# Altium PCB HD301_driver.PcbDoc (part 1 of 2)
Units mm, origin at the board's own origin, x right, y up, seen from the top; angles counter-clockwise.
Board outline 50 x 25 mm, 4 copper layers (Top, GND, POWER, Bottom), stack 0.899 mm thick; 105 components, 92 nets, 393 pads, 168 vias.
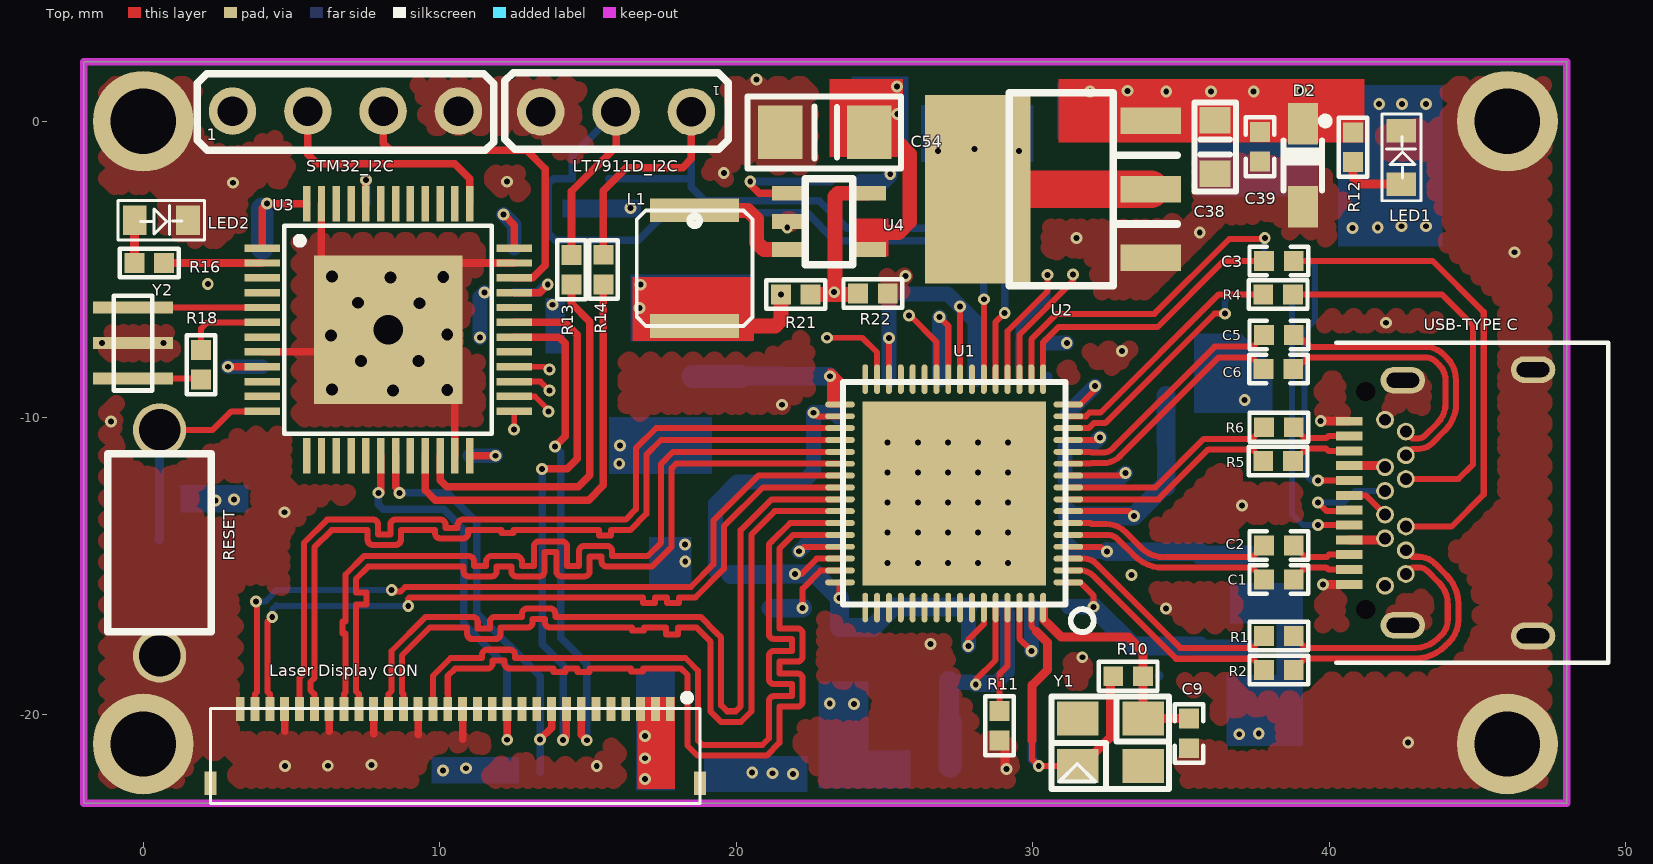
[diagram p0: Top view]
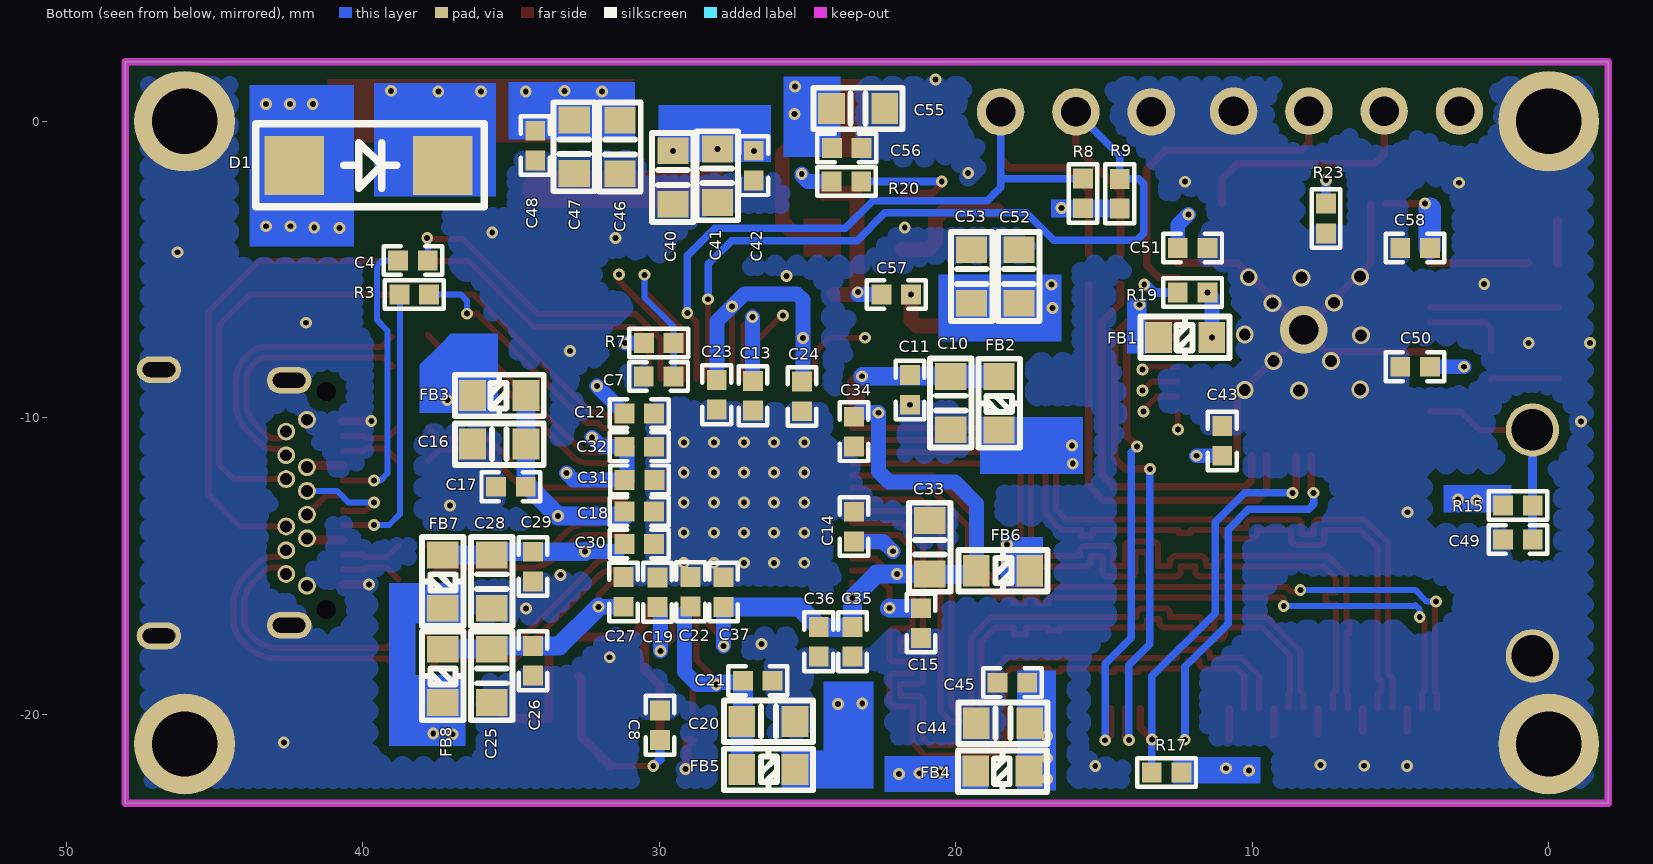
[diagram p1: Bottom view, seen from below]
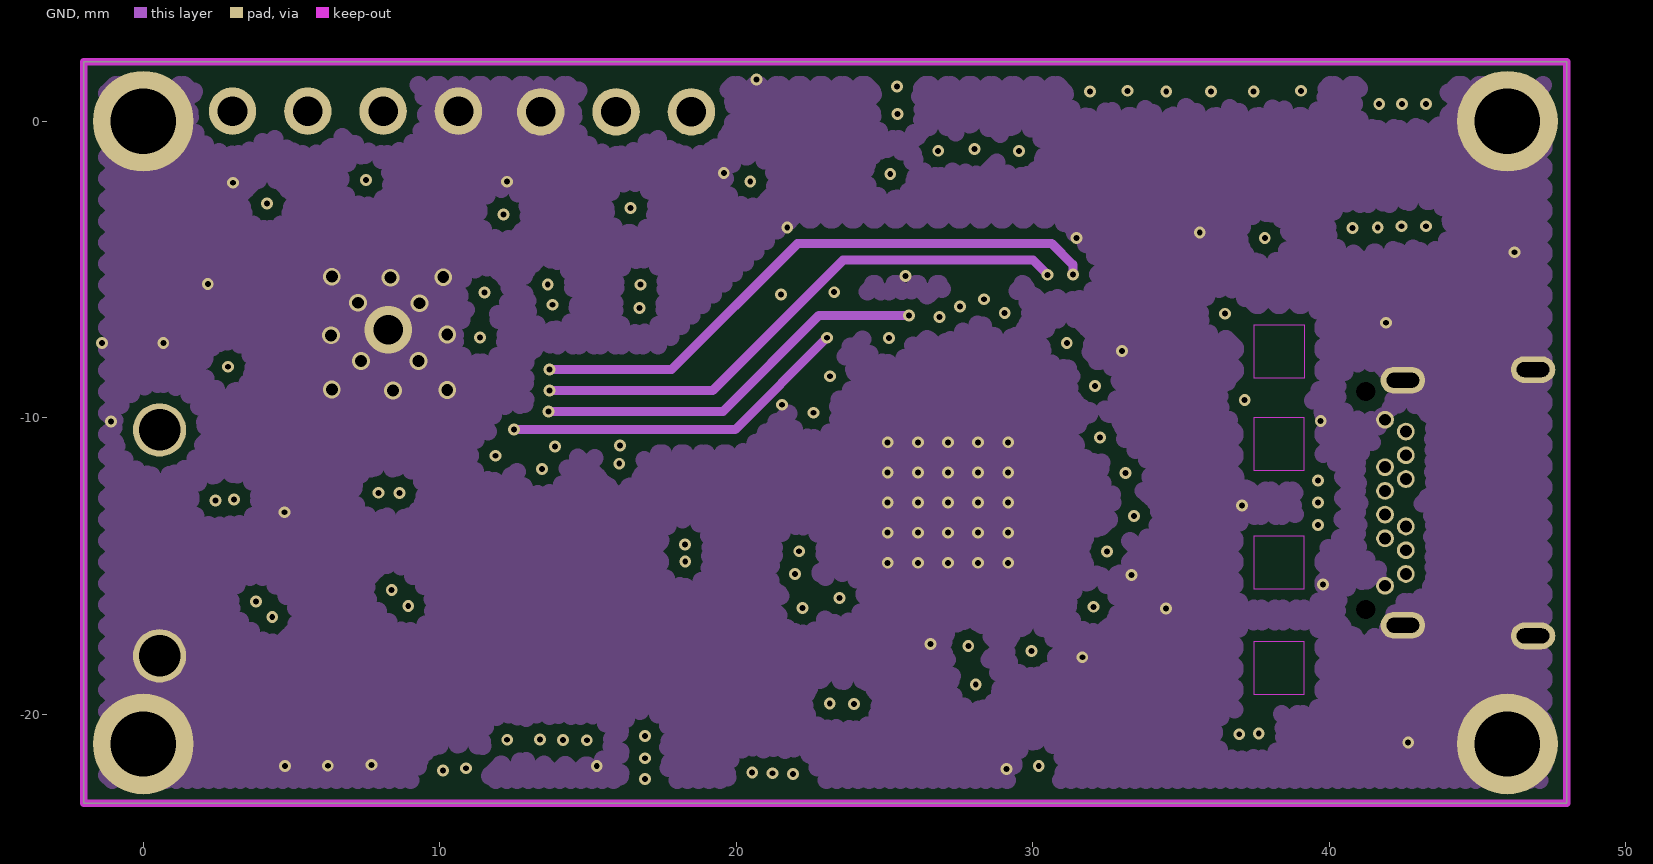
[diagram p2: GND]
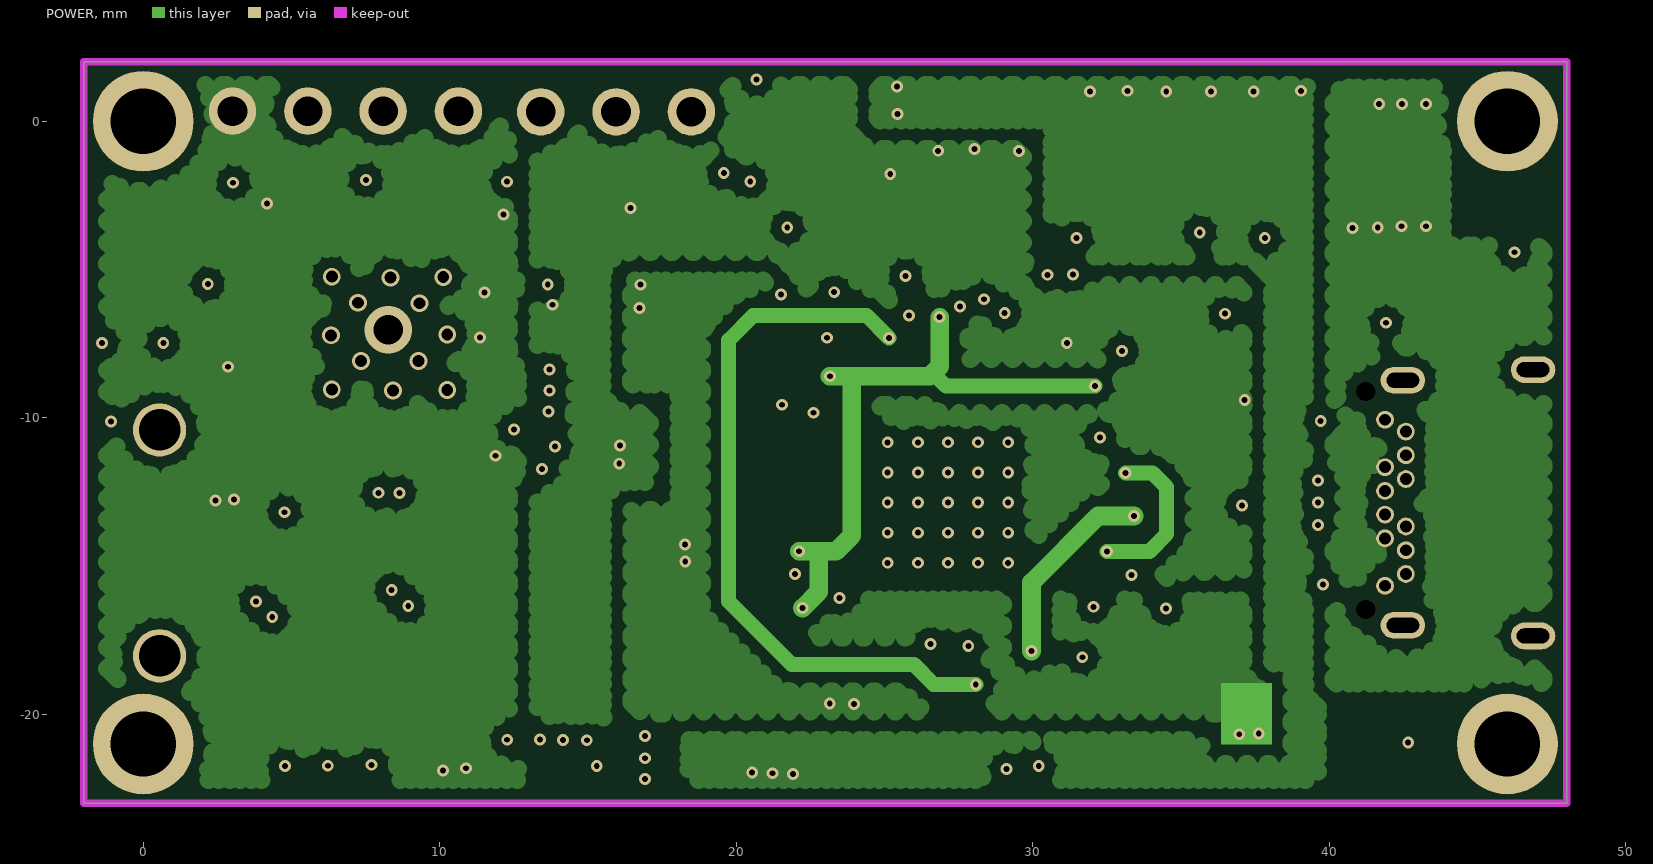
[diagram p3: POWER]

## Layer stack, top to bottom
Solder Mask Top: solder mask 0.0102, Solder Resist, Dk 3.5
Top: signal copper 0.0343
Dielectric 1: dielectric 0.254, FR-4, Dk 4.3
GND: signal copper 0.0343
Dielectric2: dielectric 0.254, FR-4, Dk 4.3
POWER: signal copper 0.0343
Dielectric3: dielectric 0.254, FR-4, Dk 4.3
Bottom: signal copper 0.0343
Solder Mask Bottom: solder mask 0.0102, Solder Resist, Dk 3.5

## Board outline
-2,-23 -2,2 48,2 48,-23

## Design rules (kind name [scope] priority, off if disabled: settings)
Clearance [All] p1: gap=0.152 except(0.35: Arc-Poly Arc-Region Track-Poly Track-Region SMDPad-Poly SMDPad-Region THPad-Poly THPad-Region Via-Poly Via-Region Fill-Poly Fill-Region Poly-Poly Poly-Region Poly-Text Region-Region Region-Text)
ComponentClearance "ComponentClearance - Default - DEFAULT" [All] p1: gap=0.152 collisioncheckmode=3 verticalgap=0.254 showdistances=FALSE
DiffPairsRouting DiffPair_DiffPairsRouting [InDifferentialPairClass('MIPIDiffPairs')] p1: maxlimit=0.2 minlimit=0.152 mostfreqgap=0.152 toplayer_minwidth=0.2 toplayer_maxwidth=0.3 toplayer_prefwidth=0.2 midlayer1_minwidth=0.2 midlayer1_maxwidth=0.3 midlayer1_prefwidth=0.2 midlayer2_minwidth=0.2 midlayer2_maxwidth=0.3 midlayer2_prefwidth=0.2 bottomlayer_minwidth=0.2 bottomlayer_maxwidth=0.3 bottomlayer_prefwidth=0.2 maxuncoupledlength=12.7
DiffPairsRouting "DiffPairsRouting - DiffPair - Default" [All] p2 off: maxlimit=0.152 minlimit=0.152 mostfreqgap=0.152 toplayer_minwidth=0.203 toplayer_maxwidth=0.203 toplayer_prefwidth=0.203 midlayer1_minwidth=0.203 midlayer1_maxwidth=0.203 midlayer1_prefwidth=0.203 midlayer2_minwidth=0.203 midlayer2_maxwidth=0.203 midlayer2_prefwidth=0.203 bottomlayer_minwidth=0.203 bottomlayer_maxwidth=0.203 bottomlayer_prefwidth=0.203 maxuncoupledlength=12.7
FanoutControl Fanout_SOIC [IsSOIC] p1: bgadir=Out bgaviamode=Centered fanoutstyle=Auto fanoutdirection=Alternating viagrid=0.025 // Fanout_SOIC (Default Rule)
FanoutControl Fanout_Small [(CompPinCount < 5)] p2: bgadir=Out bgaviamode=Centered fanoutstyle=Auto fanoutdirection=OutThenIn viagrid=0.025 // Fanout_Small (Default Rule)
FanoutControl Fanout_BGA [IsBGA] p3: bgadir=Out bgaviamode=Centered fanoutstyle=Auto fanoutdirection=Alternating viagrid=0.025 // Fanout_BGA (Default Rule)
FanoutControl Fanout_LCC [IsLCC] p4: bgadir=Out bgaviamode=Centered fanoutstyle=Auto fanoutdirection=Alternating viagrid=0.025 // Fanout_LCC (Default Rule)
HoleToHoleClearance "HoleToHoleClearance - Default - DEFAULT" [All] p1: gap=0.152 allowstackedmicrovias=TRUE
Length All [All] p1: maxlimit=1270 minlimit=0
Length "Default Length" [All] p2: maxlimit=1270 minlimit=0
MatchedLengths DiffPair_MatchedLengths [InDifferentialPairClass('MIPIDiffPairs')] p1: tolerance=0.2 checknetsindiffpair=FALSE checkdiffpairvsdiffpair=TRUE checkxsignals=TRUE checkothers=TRUE
MatchedLengths [All] p2 off: tolerance=0.127 checknetsindiffpair=FALSE checkdiffpairvsdiffpair=TRUE checkxsignals=TRUE checkothers=TRUE
MaxMinImpedance "Default Impedance" [All] p1: minimum=50.00 maximum=150.0
ParallelSegment "Default Parallel Segment Adjasent" [All] p1: limit=25.4 gap=5.08
ParallelSegment "Default Parallel Segment Same Layer" [All] p2: limit=25.4 gap=5.08
PlaneClearance "PlaneClearance - FootPrint 'CD7_3MM'" [HasFootprint('CD7_3MM')] p1: clearance=0.4 // PAD - Power Plane Clearance
PlaneConnect "PlaneConnect - FootPrint 'CD7_3MM'" [HasFootprint('CD7_3MM')] p1: planeconnectstyle=Relief reliefexpansion=0.25 reliefentries=4 reliefconductorwidth=0.4 reliefairgap=0.15
PlaneConnect "PlaneConnect - FootPrint 'CD7_3MM'_3" [HasFootprint('CD7_3MM')] p2: planeconnectstyle=Relief reliefexpansion=0.25 reliefentries=4 reliefconductorwidth=0.4 reliefairgap=0.15
PlaneConnect "Default PlaneConnect" [All] p3: planeconnectstyle=Direct reliefexpansion=0.508 reliefentries=4 reliefconductorwidth=0.381 reliefairgap=0.254
PolygonConnect "PolygonConnect - Default SMT" [IsSMTPin] p1: connectstyle=Direct reliefconductorwidth=0.254 reliefentries=4 polygonreliefangle="45 Angle" airgapwidth=0.254
PolygonConnect "PolygonConnect - FootPrint 'CD7_3MM'" [HasFootprint('CD7_3MM')] p2: connectstyle=Direct reliefconductorwidth=0.4 reliefentries=4 polygonreliefangle="45 Angle" airgapwidth=0.15
PolygonConnect "PolygonConnect - FootPrint 'CD7_3MM'_2" [HasFootprint('CD7_3MM')] p3: connectstyle=Relief reliefconductorwidth=0.4 reliefentries=4 polygonreliefangle="45 Angle" airgapwidth=0.15
PolygonConnect "PolygonConnect - Default Pad" [All] p4: connectstyle=Direct reliefconductorwidth=0.381 reliefentries=4 polygonreliefangle="45 Angle" airgapwidth=0.254
RoutingCorners [All] p1: cornerstyle=Round minsetback=2.54 maxsetback=2.54
RoutingLayers "RoutingLayers - Default - DEFAULT" [All] p1: top layer_v5=TRUE mid layer 1_v5=TRUE mid layer 2_v5=TRUE bottom layer_v5=TRUE
RoutingPriority "RoutingPriority - Default - DEFAULT" [All] p1: routingpriority=3
RoutingTopology "Default Routing Topology" [All] p1: topology=Shortest
RoutingVias "RoutingVias - Default - DEFAULT" [All] p1: holewidth=0.94 width=1.397 viastyle="Through Hole" minholewidth=0.94 minwidth=1.397 maxholewidth=0.94 maxwidth=1.397
SMDToCorner "SMDToCorner - Default - DEFAULT" [All] p1 off: distance=60000
SilkToBoardRegionClearance [All] p1 off:
SilkToSilkClearance [All] p1 off: silktosilkclearance=0.254
SilkToSolderMaskClearance [IsPad] p1 off: minsilkscreentomaskgap=0.254 clearancetoexposedcopper=TRUE
SolderMaskExpansion "SolderMaskExpansion from CAM settings" [All] p1 off: expansion=0.051
UnpouredPolygon [All] p1 off:
Width "Default Width" [All] p1: maxlimit=2 minlimit=0.152 preferedwidth=0.203 minimp=50.000000 maximp=50.000000 favimp=50.000000
13 further rules are at their usual default settings.

## Classes and differential pairs
net class C1_Nets: DP_D1_P NetC1_1
net class C2_Nets: DP_D1_N NetC2_1
net class C3_Nets: AUX+ NetC3_1
net class C4_Nets: AUX- NetC4_1
net class C5_Nets: DP_D3_N NetC5_1
net class C6_Nets: DP_D3_P NetC6_1
net class C7_Nets: GND RSTN
net class C8_Nets: GND XTALO
net class C9_Nets: GND XTALI
net class C10_Nets: GND VCC33_TX
net class C11_Nets: GND VCC33_TX
net class C12_Nets: GND VCC33_TX
net class C13_Nets: GND VCC33_TX
net class C14_Nets: GND VCC33_TX
net class C15_Nets: GND VCC33_TX
net class C16_Nets: GND VCC33_RX
net class C17_Nets: GND VCC33_RX
net class C18_Nets: GND VCC33_RX
net class C19_Nets: GND VCC33_RX
net class C20_Nets: GND VDD
net class C21_Nets: GND VDD
net class C22_Nets: GND VDD
net class C23_Nets: GND VDD
net class C24_Nets: GND VDD
net class C25_Nets: GND VCC12D_RX
net class C26_Nets: GND VCC12D_RX
net class C27_Nets: GND VCC12D_RX
net class C28_Nets: GND VCC12A_RX
net class C29_Nets: GND VCC12A_RX
net class C30_Nets: GND VCC12A_RX
net class C31_Nets: GND VCC12A_RX
net class C32_Nets: GND VCC12A_RX
net class C33_Nets: GND VCC12_TX
net class C34_Nets: GND VCC12_TX
net class C35_Nets: GND VCC12_TX
net class C36_Nets: GND VCC12_TX
net class C37_Nets: GND VCC12_TX
net class C38_Nets: +5V GND
net class C39_Nets: +5V GND
net class C40_Nets: GND VCC33
net class C41_Nets: GND VCC33
net class C42_Nets: GND VCC33
net class C43_Nets: GND VCC33_STM
net class C44_Nets: GND NetC44_1
net class C45_Nets: GND NetC44_1
net class C46_Nets: +5V GND
net class C47_Nets: +5V GND
net class C48_Nets: +5V GND
net class C49_Nets: GND NRST
net class C50_Nets: GND VCC33_STM
net class C51_Nets: GND VCC33_STM
net class C52_Nets: GND NetC52_1
net class C53_Nets: GND NetC52_1
net class C54_Nets: +5V GND
net class C55_Nets: +5V GND
net class C56_Nets: +5V GND
net class C57_Nets: NetC52_1 NetC57_1
net class C58_Nets: GND VCC33_STM
net class D1_Nets: +5V VBUS
net class D2_Nets: +5V GND
net class FB1_Nets: VCC33 VCC33_STM
net class FB2_Nets: VCC33 VCC33_TX
net class FB3_Nets: VCC33 VCC33_RX
net class FB4_Nets: +5V NetC44_1
net class FB5_Nets: NetC52_1 VDD
net class FB6_Nets: NetC52_1 VCC12_TX
net class FB7_Nets: NetC52_1 VCC12A_RX
net class FB8_Nets: NetC52_1 VCC12D_RX
net class L1_Nets: NetC52_1 NetL1_1
net class "Laser Display CON_Nets": GND HD_READY HD_RESET MIPI_N1_CLK_N MIPI_N1_CLK_P MIPI_N1_D0_N MIPI_N1_D0_P MIPI_N1_D1_N MIPI_N1_D1_P MIPI_N1_D2_N MIPI_N1_D2_P MIPI_N1_D3_N MIPI_N1_D3_P NetC44_1 "NetLaser Display CON_4" "NetLaser Display CON_5" "NetLaser Display CON_6" "NetLaser Display CON_10" "NetLaser Display CON_11" "NetLaser Display CON_13" "NetLaser Display CON_14" UART_RX UART_TX
net class LED1_Nets: GND NetLED1_1
net class LED2_Nets: GND NetLED2_1
net class LT7911D_I2C_Nets: CSCL CSDA GND
net class R1_Nets: DP_D0_N NetR1_2
net class R2_Nets: DP_D0_P NetR2_2
net class R3_Nets: CC1 NetR3_1
net class R4_Nets: CC2 NetR4_2
net class R5_Nets: DP_D2_P NetR5_1
net class R6_Nets: DP_D2_N NetR6_1
net class R7_Nets: RSTN VCC33
net class R8_Nets: CSDA VCC33
net class R9_Nets: CSCL VCC33
net class R10_Nets: XTALI XTALO
net class R11_Nets: GND REXT
net class R12_Nets: +5V NetLED1_1
net class R13_Nets: CSDA NetR13_1
net class R14_Nets: CSCL NetR14_1
net class R15_Nets: NRST VCC33_STM
net class R16_Nets: LED NetLED2_1
net class R17_Nets: HD_RESET VCC33_STM
net class R18_Nets: NetR18_1 NetR18_2
net class R19_Nets: NetR19_1 VCC33_STM
net class R20_Nets: NetR20_2 VCC33
net class R21_Nets: NetC52_1 NetC57_1
net class R22_Nets: GND NetC57_1
net class R23_Nets: GND NetR23_2
net class RESET_Nets: GND NRST
net class STM32_I2C_Nets: GND SWCLK SWDIO VCC33_STM
net class U1_Nets: AUX+ AUX- CC1 CC2 CSCL CSDA DP_D0_N DP_D0_P DP_D1_N DP_D1_P DP_D2_N DP_D2_P DP_D3_N DP_D3_P GND GPIO5 IIS_D0 IIS_MCLK IIS_SCLK IIS_WS MIPI_N0_CLK_N MIPI_N0_CLK_P MIPI_N0_D0_N MIPI_N0_D0_P MIPI_N0_D1_N MIPI_N0_D1_P MIPI_N0_D2_N MIPI_N0_D2_P MIPI_N0_D3_N MIPI_N0_D3_P MIPI_N1_CLK_N MIPI_N1_CLK_P MIPI_N1_D0_N MIPI_N1_D0_P MIPI_N1_D1_N MIPI_N1_D1_P MIPI_N1_D2_N MIPI_N1_D2_P MIPI_N1_D3_N MIPI_N1_D3_P NetU1_23 REXT RSTN SLEEP_33 VCC12_TX VCC12A_RX VCC12D_RX VCC33_RX VCC33_TX VDD VSYNC XTALI XTALO
net class U2_Nets: +5V GND VCC33
net class U3_Nets: GND GPIO5 HD_READY HD_RESET LED NetR13_1 NetR14_1 NetR18_1 NetR19_1 NetR23_2 NetU3_3 NetU3_4 NetU3_5 NetU3_7 NetU3_10 NetU3_11 NetU3_13 NetU3_14 NetU3_15 NetU3_16 NetU3_17 NetU3_20 NetU3_29 NetU3_32 NetU3_38 NetU3_39 NetU3_40 NetU3_41 NetU3_42 NetU3_43 NetU3_45 NetU3_46 NRST RSTN SLEEP_33 SWCLK SWDIO UART_RX UART_TX VCC33_STM VSYNC
net class U4_Nets: +5V GND NetC57_1 NetL1_1 NetR20_2
net class "USB-TYPE C_Nets": GND NetC1_1 NetC2_1 NetC3_1 NetC4_1 NetC5_1 NetC6_1 NetR1_2 NetR2_2 NetR3_1 NetR4_2 NetR5_1 NetR6_1 "NetUSB-TYPE C_5" "NetUSB-TYPE C_6" USB_D_N USB_D_P VBUS
net class Y1_Nets: XTALI XTALO
net class Y2_Nets: GND NetR18_2 NetU3_5
differential pair class MIPIDiffPairs: MIPI_N1_CLK MIPI_N1_D0 MIPI_N1_D1 MIPI_N1_D2 MIPI_N1_D3
differential pair MIPI_N1_CLK: +MIPI_N1_CLK_P -MIPI_N1_CLK_N
differential pair MIPI_N1_D0: +MIPI_N1_D0_P -MIPI_N1_D0_N
differential pair MIPI_N1_D1: +MIPI_N1_D1_P -MIPI_N1_D1_N
differential pair MIPI_N1_D2: +MIPI_N1_D2_P -MIPI_N1_D2_N
differential pair MIPI_N1_D3: +MIPI_N1_D3_P -MIPI_N1_D3_N
differential pair DP_D1: +DP_D1_P -DP_D1_N
differential pair DP_D2: +DP_D2_P -DP_D2_N

## Components (designator, comment, footprint, x,y, rotation, side; value= is the part's Value field where it differs from the comment)
C1 "0.1uF" 0402-C 38.295,-15.449 r180 top
C2 "0.1uF" 0402-C 38.295,-14.306 r180 top
C3 "0.1uF" 0402-C 38.295,-4.71 r180 top
C4 "0.1uF" 0402-C 38.3,-4.7 r180 bottom
C5 "0.1uF" 0402-C 38.295,-7.213 r180 top
C6 "0.1uF" 0402-C 38.279,-8.356 r180 top
C7 "0.1uF" 0402-C 30.017,-8.603 r0 bottom
C8 "15pF" 0402-C 29.974,-20.369 r90 bottom
C9 "15pF" 0402-C 35.265,-20.645 r270 top
C10 "10uF" 0603-C 20.166,-9.506 r270 bottom
C11 "0.1uF" 0402-C 21.54,-9.06 r270 bottom
C12 "0.1uF" 0402-C 30.666,-9.857 r180 bottom
C13 "0.1uF" 0402-C 26.835,-9.255 r270 bottom
C14 "0.1uF" 0402-C 23.427,-13.668 r90 bottom
C15 "0.1uF" 0402-C 21.167,-16.922 r270 bottom
C16 "10uF" 0603-C 35.39,-10.887 r0 bottom
C17 "0.1uF" 0402-C 34.998,-12.325 r0 bottom
C18 "0.1uF" 0402-C 30.666,-13.159 r180 bottom
C19 "0.1uF" 0402-C 30.058,-15.881 r90 bottom
C20 "10uF" 0603-C 26.315,-20.239 r180 bottom
C21 "0.1uF" 0402-C 26.67,-18.867 r180 bottom
C22 "0.1uF" 0402-C 28.936,-15.869 r90 bottom
C23 "0.1uF" 0402-C 28.057,-9.223 r270 bottom
C24 "0.1uF" 0402-C 25.176,-9.28 r270 bottom
C25 "10uF" 0603-C 35.645,-18.7 r270 bottom
C26 "0.1uF" 0402-C 34.248,-18.192 r270 bottom
C27 "0.1uF" 0402-C 31.202,-15.872 r90 bottom
C28 "10uF" 0603-C 35.645,-15.525 r270 bottom
C29 "0.1uF" 0402-C 34.248,-15.017 r270 bottom
C30 "0.1uF" 0402-C 30.666,-14.252 r180 bottom
C31 "0.1uF" 0402-C 30.661,-12.092 r180 bottom
C32 "0.1uF" 0402-C 30.666,-10.975 r180 bottom
C33 "10uF" 0603-C 20.874,-14.365 r90 bottom
C34 "0.1uF" 0402-C 23.427,-10.467 r270 bottom
C35 "0.1uF" 0402-C 23.478,-17.554 r270 bottom
C36 "0.1uF" 0402-C 24.616,-17.554 r270 bottom
C37 "0.1uF" 0402-C 27.83,-15.877 r90 bottom
C38 "10uF" 0603-C 36.143,-0.869 r270 top
C39 "0.1uF" 0402-C 37.655,-0.863 r90 top
C40 "10uF" 0603-C 29.536,-1.898 r270 bottom
C41 "1uF" 0603-C 28.036,-1.838 r270 bottom
C42 "0.1uF" 0402-C 26.807,-1.497 r270 bottom
C43 "0.1uF" 0402-C 11.01,-10.78 r90 bottom
C44 "10uF" 0603-C 18.407,-20.3 r0 bottom
C45 "0.1uF" 0402-C 18.086,-18.933 r0 bottom
C46 "10uF" 0603-C 31.32,-0.87 r270 bottom
C47 "1uF" 0603-C 32.86,-0.86 r270 bottom
C48 "0.1uF" 0402-C 34.178,-0.821 r270 bottom
C49 "0.1uF" 0402-C 1.04,-14.106 r0 bottom
C50 "0.1uF" 0402-C 4.51,-8.28 r180 bottom
C51 "0.1uF" 0402-C 12.01,-4.28 r180 bottom
C52 "10uF" 0603-C 17.868,-5.234 r90 bottom
C53 "10uF" 0603-C 19.461,-5.234 r90 bottom
C54 "47uF" 1206-C 22.975,-0.372 r180 top
C55 "10uF" 0603-C 23.29,0.43 r180 bottom
C56 "0.1uF" 0402-C 23.672,-0.9 r180 bottom
C57 "22pF" 0402-C 22.004,-5.84 r180 bottom
C58 "0.1uF" 0402-C 4.51,-4.28 r0 bottom
D1 "SM340A" SM340A_DO-214AC 39.8,-1.49 r270 bottom
D2 "MM3Z5V6" PDZ_B-SOD323 39.106,-1.49 r270 top
FB1 "220R/100MHz" 0603-FB 12.26,-7.29 r180 bottom
FB2 "220R/100MHz" 0603-FB 18.537,-9.51 r90 bottom
FB3 "220R/100MHz" 0603-FB 35.39,-9.248 r180 bottom
FB4 "220R/100MHz" 0603-FB 18.424,-21.915 r180 bottom
FB5 "220R/100MHz" 0603-FB 26.316,-21.859 r0 bottom
FB6 "220R/100MHz" 0603-FB 18.404,-15.159 r0 bottom
FB7 "220R/100MHz" 0603-FB 37.296,-15.525 r90 bottom
FB8 "220R/100MHz" 0603-FB 37.296,-18.7 r90 bottom
L1 "10uH/1A" Inductor_LPS4018-103MR 18.595,-4.956 r270 top
"Laser Display CON" "MIPI-DSI" 50696-030-0-M 10.52,-19.8 r0 top
LED1 "BLUE" SMD_LED(0603) 42.425,-1.222 r90 top
LED2 "BLUE" SMD_LED(0603) 0.61,-3.34 r0 top
LT7911D_I2C "CON_LT" HEADER-FEMALE-2.54*3 15.944,0.317 r270 top (schematic designator J2)
R1 "0R" 0402-R 38.295,-17.362 r0 top
R2 "0R" 0402-R 38.295,-18.505 r0 top
R3 "0R" 0402-R 38.26,-5.84 r180 bottom
R4 "0R" 0402-R 38.27,-5.84 r0 top
R5 "0R" 0402-R 38.27,-11.46 r180 top
R6 "0R" 0402-R 38.295,-10.318 r180 top
R7 "4.7k" 0402-R 30.01,-7.48 r180 bottom
R8 "4.7k" 0402-R 14.466,-2.446 r270 bottom
R9 "4.7k" 0402-R 15.701,-2.436 r270 bottom
R10 "1M" 0402-R 33.212,-18.716 r0 top
R11 "7K68_1%" 0402-R 28.878,-20.382 r90 top
R12 "510" 0402-R 40.798,-0.874 r270 top
R13 "0R" 0402-R 14.441,-5.005 r90 top
R14 "0R" 0402-R 15.516,-5 r90 top
R15 "4.7k" 0402-R 1.04,-12.961 r180 bottom
R16 "510" 0402-R 0.2,-4.78 r180 top
R17 "4.7k" 0402-R 12.886,-21.96 r180 bottom
R18 "510" 0402-R 1.95,-8.21 r270 top
R19 "4.7k" 0402-R 12.01,-5.78 r180 bottom
R20 "0R" 0402-R 23.682,-2.032 r180 bottom
R21 "150k" 0402-R 22.004,-5.84 r180 top
R22 "150k" 0402-R 24.604,-5.806 r180 top
R23 "4.7k" 0402-R 7.51,-3.28 r90 bottom
RESET "BUTTON_DIP" "Push button_mini(2 pin)" 0.55,-14.22 r0 top
STM32_I2C "CON_STM" HEADER-FEMALE-2.54*4 6.82,0.34 r90 top (schematic designator J3)
U1 "LT7911D" QFN64_EPAD 27.346,-12.549 r180 top
U2 "AMS1117-3.3V" AMS1117_SOT-223_4 33.99,-4.621 r90 top
U3 "STM32F103CBT7" LQFP48-7mm*7mm 8.26,-7.03 r0 top
U4 "TD6810" TD6810_SOT23-5 21.82,-2.43 r270 top
"USB-TYPE C" "USB-TYPEC" USB_TYPEC_RECEPTACLE_DIP 41.226,-16.465 r90 top (schematic designator J1)
Y1 "27MHz" CRY_3225 32.614,-20.944 r180 top
Y2 "8MHz" Resonator_mini -0.34,-7.48 r270 top

## Footprints (in the part's own frame and the unit in brackets; to place one, negate y for a bottom-side part, rotate by r counter-clockwise, add the part's x,y. Pads: shape width x height; smd on the part's side, far side on the other; paste and mask are expansions set on the pad)
0402-C [mm]
  rect 0.67x0.67 smd: 1(-0.5,0) 2(0.5,0)
  silkscreen extent -0.99,-0.48 0.99,0.48
0402-R [mm]
  rect 0.67x0.67 smd: 1(-0.5,0) 2(0.5,0)
  silkscreen extent -0.99,-0.48 0.99,0.48
0603-C [mm]
  rect 0.9x1.05 smd mask+0.05: 1(-0.9,0) 2(0.9,0)
  silkscreen extent -1.5,-0.7 1.5,0.7
0603-FB [mm]
  rect 0.9x1.05 smd mask+0.05: 1(-0.9,0) 2(0.9,0)
  silkscreen extent -1.5,-0.7 1.5,0.7
1206-C [mm]
  rect 1.5x1.8 smd: 1(-1.5,0) 2(1.5,0)
  silkscreen extent -2.58,-1.2 2.6,1.23
50696-030-0-M [mm]
  rect 0.4x0.8 smd: 0(-8.25,-2.52) 0(8.25,-2.52)
  rect 0.3x0.8 smd: 1(7.25,-0.02) 2(6.75,-0.02) 3(6.25,-0.02) 4(5.75,-0.02) 5(5.25,-0.02) 6(4.75,-0.02) 7(4.25,-0.02) 8(3.75,-0.02) 9(3.25,-0.02) 10(2.75,-0.02) 11(2.25,-0.02) 12(1.75,-0.02) 13(1.25,-0.02) 14(0.75,-0.02) 15(0.25,-0.02) 16(-0.25,-0.02) 17(-0.75,-0.02) 18(-1.25,-0.02) 19(-1.75,-0.02) 20(-2.25,-0.02) 21(-2.75,-0.02) 22(-3.25,-0.02) 23(-3.75,-0.02) 24(-4.25,-0.02) 25(-4.75,-0.02) 26(-5.25,-0.02) 27(-5.75,-0.02) 28(-6.25,-0.02) 29(-6.75,-0.02) 30(-7.25,-0.02)
  silkscreen extent -8.25,-3.2 8.25,0.47
AMS1117_SOT-223_4 [mil]
  rect 35x80 smd: 1(0.46,0.53) 2(91.46,0.53) 3(182.46,0.53)
  rect 250x140 smd: 4(91.46,230.53)
  silkscreen extent -37,-34 219,189
CRY_3225 [mm]
  rect 1.4x1.15 smd: 1(1.1,0.8) 2(-1.1,0.8) 3(-1.1,-0.8) 4(1.1,-0.8)
  silkscreen extent -1.98,-1.55 1.98,1.57
HEADER-FEMALE-2.54*3 [mm]
  round 1.6 hole 1: 1(0,2.54) 2(0,0) 3(0,-2.54)
  silkscreen extent -1.32,-3.75 1.26,3.79, body extent -1.46,-3.75 1.26,3.79, height 9
HEADER-FEMALE-2.54*4 [mm]
  round 1.6 hole 1: 1(0,3.81) 2(0,1.27) 3(0,-1.27) 4(0,-3.81)
  silkscreen extent -1.32,-5 1.26,5, body extent -1.32,-5 1.26,5, height 9
Inductor_LPS4018-103MR [mm]
  rect 0.8x3 smd: 1(-1.95,0) 2(1.95,0)
  silkscreen extent -1.95,-1.95 1.95,1.95, body extent -1.95,-1.95 1.95,1.95, height 2.5
LQFP48-7mm*7mm [mm]
  rect 1.2x0.25 smd: 1(-4.25,2.75) 2(-4.25,2.25) 3(-4.25,1.75) 4(-4.25,1.25) 5(-4.25,0.75) 6(-4.25,0.25) 7(-4.25,-0.25) 8(-4.25,-0.75) 9(-4.25,-1.25) 10(-4.25,-1.75) 11(-4.25,-2.25) 12(-4.25,-2.75) 25(4.25,-2.75) 26(4.25,-2.25) 27(4.25,-1.75) 28(4.25,-1.25) 29(4.25,-0.75) 30(4.25,-0.25) 31(4.25,0.25) 32(4.25,0.75) 33(4.25,1.25) 34(4.25,1.75) 35(4.25,2.25) 36(4.25,2.75)
  rect 0.25x1.2 smd: 13(-2.75,-4.25) 14(-2.25,-4.25) 15(-1.75,-4.25) 16(-1.25,-4.25) 17(-0.75,-4.25) 18(-0.25,-4.25) 19(0.25,-4.25) 20(0.75,-4.25) 21(1.25,-4.25) 22(1.75,-4.25) 23(2.25,-4.25) 24(2.75,-4.25) 37(2.75,4.25) 38(2.25,4.25) 39(1.75,4.25) 40(1.25,4.25) 41(0.75,4.25) 42(0.25,4.25) 43(-0.25,4.25) 44(-0.75,4.25) 45(-1.25,4.25) 46(-1.75,4.25) 47(-2.25,4.25) 48(-2.75,4.25)
  rect 5x5 smd: 23(0,0)
  silkscreen extent -3.5,-3.5 3.5,3.5, body extent -4.5,-4.52 4.5,4.48, height 1.5
PDZ_B-SOD323 [mm]
  rect 1.4x1 smd: A(1.4,0) C(-1.4,0)
  silkscreen extent -1.62,-0.65 0.85,0.88
"Push button_mini(2 pin)" [mm]
  round 1.8 hole 1.4: 1(0,3.81) 2(0,-3.81)
  silkscreen extent -1.75,-3 1.75,3, body extent -1.68,-3 1.72,3, height 3
QFN64_EPAD [mm]
  oval 1x0.2 smd: 1(-3.85,3) 2(-3.85,2.6) 3(-3.85,2.2) 4(-3.85,1.8) 5(-3.85,1.4) 6(-3.85,1) 7(-3.85,0.6) 8(-3.85,0.2) 9(-3.85,-0.2) 10(-3.85,-0.6) 11(-3.85,-1) 12(-3.85,-1.4) 13(-3.85,-1.8) 14(-3.85,-2.2) 15(-3.85,-2.6) 16(-3.85,-3) 33(3.85,-3) 34(3.85,-2.6) 35(3.85,-2.2) 36(3.85,-1.8) 37(3.85,-1.4) 38(3.85,-1) 39(3.85,-0.6) 40(3.85,-0.2) 41(3.85,0.2) 42(3.85,0.6) 43(3.85,1) 44(3.85,1.4) 45(3.85,1.8) 46(3.85,2.2) 47(3.85,2.6) 48(3.85,3)
  oval 0.2x1 smd: 17(-3,-3.85) 18(-2.6,-3.85) 19(-2.2,-3.85) 20(-1.8,-3.85) 21(-1.4,-3.85) 22(-1,-3.85) 23(-0.6,-3.85) 24(-0.2,-3.85) 25(0.2,-3.85) 26(0.6,-3.85) 27(1,-3.85) 28(1.4,-3.85) 29(1.8,-3.85) 30(2.2,-3.85) 31(2.6,-3.85) 32(3,-3.85) 49(3,3.85) 50(2.6,3.85) 51(2.2,3.85) 52(1.8,3.85) 53(1.4,3.85) 54(1,3.85) 55(0.6,3.85) 56(0.2,3.85) 57(-0.2,3.85) 58(-0.6,3.85) 59(-1,3.85) 60(-1.4,3.85) 61(-1.8,3.85) 62(-2.2,3.85) 63(-2.6,3.85) 64(-3,3.85)
  rect 6.2x6.2 smd: 65(0,0)
  silkscreen extent -4.71,-3.75 3.75,4.68
Resonator_mini [mm]
  rect 0.4x2.7 smd: 1(-1.2,0) 2(1.2,0) 3(0,0)
  silkscreen extent -1.6,-0.65 1.6,0.65, body extent -1.58,-0.66 1.6,0.64, height 2.5
SM340A_DO-214AC [mm]
  rrect0% 2x2 smd: A(0,-2.5) C(0,2.5)
  silkscreen extent -1.4,-3.8 1.4,3.9
SMD_LED(0603) [mm]
  rect 0.8x1 smd: 1(-0.9,0) 2(0.9,0)
  silkscreen extent -1.46,-0.66 1.46,0.66
TD6810_SOT23-5 [mm]
  rect 0.5x1.22 smd: 1(0,0) 2(0.95,0) 3(1.9,0) 4(1.9,2.62) 5(0,2.62)
  silkscreen extent -0.49,0.51 2.41,2.11
USB_TYPEC_RECEPTACLE_DIP [mm]
  oval 0.9x1.5 hole 0.5 slot 1.1 at 90 deg: 1(-0.53,-1.25) 2(7.73,-1.25) 3(-0.89,-5.64) 4(8.09,-5.64)
  round 0 hole 0.65: 5(0,0) 6(7.35,0)
  rect 0.3x0.9 smd: A1(0.85,0.56) A2(1.35,0.56) A3(1.85,0.56) A4(2.35,0.56) A5(2.85,0.56) A6(3.35,0.56) A7(3.85,0.56) A8(4.35,0.56) A9(4.85,0.56) A10(5.35,0.56) A11(5.85,0.56) A12(6.35,0.56)
  round 0.6 hole 0.4: B1(6.4,-0.65) B2(6,-1.35) B3(5.2,-1.35) B4(4.8,-0.65) B5(4.4,-1.35) B6(4,-0.65) B7(3.2,-0.65) B8(2.8,-1.35) B9(2.4,-0.65) B10(2,-1.35) B11(1.2,-1.35) B12(0.8,-0.65)
  silkscreen extent -1.8,-8.17 9,1

## Part data
C1 C2 C3 C4 C5 C6 C7 C8 C9 C10 C11 C12 C13 C14 C15 C16 C17 C18 C19 C20 C21 C22 C23 C24 C25 C26 C27 C28 C29 C30 C31 C32 C33 C34 C35 C36 C37 C38 C39 C40 C41 C42 C43 C44 C45 C46 C47 C48 C49 C50 C51 C52 C53 C54 C55 C56 C57 C58: library part Cap, "Capacitor"
D1: library part "Diode 10TQ035", "Schottky Rectifier"
D2: library part BAT46W
FB1 FB2 FB3 FB4 FB5 FB6 FB7 FB8 R1 R2 R3 R4 R5 R6 R7 R8 R9 R10 R11 R12 R13 R14 R15 R16 R17 R18 R19 R20 R21 R22 R23: library part Res2, "Resistor"
L1: library part Inductor, "Inductor"
LED1 LED2: library part LED1, "Typical RED GaAs LED"
LT7911D_I2C: library part 3PinConnector
RESET: library part SW-PB, "Switch"
STM32_I2C: library part 4PinConnector
U1: "USB/MIPI port converter"
U2: "3.3V Voltage Regulator"
U3: library part STM32F303CBT7, "32bit MCU"
U4: "voltage regulater"
"USB-TYPE C": "USB-TYPEC INPUT"
Y1: library part XTAL_2, "Crystal Oscillator"
Y2: library part XTAL, "Crystal Oscillator"

## Free pads (board coordinates)
  round 3.4 hole 2.2: 2(0,-21) 2(0,0) 2(46,-21) 2(46,0)

## Via types
v1: diameter 0.4, hole 0.2, Top to Bottom, 155 vias
v2: diameter 0.6, hole 0.4, Top to Bottom, 12 vias
v3: diameter 1.6, hole 1, Top to Bottom, 1 vias

## Nets (pads, with @x,y where several pads share a name; then routed paths per layer and width w, separated by ;. In a path a pad name is that pad's centre, name@x,y a point inside that pad or via, vN(x,y) a via of type N, cw(c..) or ccw(c..) an arc to the next point about the centre after c; other vN are vias at no path point)
+5V: C38.1 C39.2 C46.1 C47.1 C48.1 C54.1 C55.1 C56.1 D1.C D2.C FB4.1 R12.1 U2.3 U4.4 | length 5.1
  Top w0.5: C54.1@24.475,-0.372 25.101,-0.372 25.849,-1.119 25.849,-3.377 25.475,-3.751 24.84,-3.751
  other v1: 21.219,-21.986 21.914,-22.006 20.535,-21.967 25.433,0.247 31.925,1.003 33.188,1.026 34.498,1.006 36.001,1.006 37.446,1.006 39.045,1.026 25.412,1.174
AUX+: C3.2 U1.17 | length 9.8
  Top w0.203: U1.17@30.346,-8.699 30.346,-7.457 30.857,-6.946 34.202,-6.946 36.437,-4.71 C3.2@37.795,-4.71
AUX-: C4.2 U1.18 | length 11.4
  Top w0.203: U1.18@29.946,-8.699 29.946,-7.354 30.804,-6.496 34.097,-6.496 36.63,-3.964 v1@37.82,-3.964
  Bottom w0.203: C4.2@37.8,-4.7 37.8,-3.96 v1(37.82,-3.94)
CC1: R3.2 U1.14 | length 8.7
  Top w0.203: U1.14@31.196,-10.349 31.888,-10.349 32.059,-10.179 32.434,-10.179 36.123,-6.49 v1(36.48,-6.49)
  Bottom w0.203: v1(36.48,-6.49) 36.48,-6.05 36.69,-5.84 R3.2@37.76,-5.84
CC2: R4.1 U1.15 | length 8.3
  Top w0.203: U1.15@31.196,-9.949 31.786,-9.949 31.912,-9.823 32.287,-9.823 36.27,-5.84 R4.1@37.77,-5.84
CSCL: LT7911D_I2C.1 R9.1 R14.2 U1.21 | length 28.3
  Top w0.2: U1.21@28.746,-8.699 28.746,-6.767 v1(29.049,-6.464)
  Top w0.254: R14.2@15.516,-4.5 15.516,-2.339 16.292,-1.563 18.186,-1.563 18.484,-1.264 LT7911D_I2C.1@18.484,0.317
  Bottom w0.254: R9.1@15.701,-1.936 18.484,-1.936 ; LT7911D_I2C.1@18.484,0.317 18.484,-1.936 ; v1(29.049,-6.464) 29.049,-4.539 28.118,-3.609 23.718,-3.609 22.787,-2.677 18.938,-2.677 18.484,-2.224 18.484,-1.936
CSDA: LT7911D_I2C.2 R8.1 R13.2 U1.22 | length 30.6
  Top w0.2: U1.22@28.346,-8.699 v1(28.346,-6.003)
  Top w0.254: R13.2@14.441,-4.505 14.441,-2.365 15.944,-0.862 LT7911D_I2C.2@15.944,0.317
  Bottom w0.254: LT7911D_I2C.2@15.944,0.317 14.466,-1.161 R8.1@14.466,-1.946 13.82,-1.946 13.662,-2.104 13.662,-3.778 13.9,-4.016 16.694,-4.016 17.62,-3.09 22.384,-3.09 23.318,-4.024 27.556,-4.024 28.346,-4.814 v1(28.346,-6.003)
DP_D0_N: R1.1 U1.3 | length 8
  Top w0.203: U1.3@31.196,-14.749 31.743,-14.749 cw(c31.743,-15.273) 32.113,-14.903 34.967,-17.756 ; 34.977,-17.766 37.391,-17.766 R1.1@37.795,-17.362
DP_D0_P: R2.1 U1.2 | length 8
  Top w0.203: U1.2@31.196,-15.149 31.613,-15.149 cw(c31.613,-15.739) 32.03,-15.322 34.833,-18.125 37.415,-18.125 R2.1@37.795,-18.505
DP_D1_N: C2.2 U1.6 | length 7.1
  Top w0.203: U1.6@31.196,-13.549 31.95,-13.549 31.982,-13.581 32.483,-13.581 cw(c32.483,-14.47) 33.112,-13.841 33.658,-14.388 ccw(c34.412,-13.634) 34.412,-14.7 ; 34.483,-14.7 37.401,-14.7 C2.2@37.795,-14.306
DP_D1_P: C1.2 U1.5 | length 7.1
  Top w0.203: U1.5@31.196,-13.949 32.513,-13.949 cw(c32.513,-14.441) 32.861,-14.093 33.408,-14.641 ccw(c34.409,-13.64) 34.409,-15.056 37.401,-15.056 C1.2@37.795,-15.449
DP_D2_N: R6.2 U1.9 | length 7.4
  Top w0.203: U1.9@31.196,-12.349 34.131,-12.349 35.768,-10.712 37.401,-10.712 R6.2@37.795,-10.318
DP_D2_P: R5.2 U1.8 | length 7.5
  Top w0.203: U1.8@31.196,-12.749 34.233,-12.749 35.915,-11.068 37.401,-11.068 37.782,-11.448 R5.2@37.795,-11.461
DP_D3_N: C5.2 U1.12 | length 8.2
  Top w0.203: U1.12@31.196,-11.149 31.95,-11.149 31.972,-11.171 32.363,-11.171 ccw(c32.363,-10.702) 32.695,-11.034 36.128,-7.601 37.407,-7.601 C5.2@37.795,-7.213
DP_D3_P: C6.2 U1.11 | length 8.2
  Top w0.203: U1.11@31.196,-11.549 31.95,-11.549 31.972,-11.527 32.365,-11.527 ccw(c32.365,-10.707) 32.945,-11.287 36.268,-7.963 37.386,-7.963 C6.2@37.779,-8.356
GND: "Laser Display CON.15" "Laser Display CON.18" "Laser Display CON.21" "Laser Display CON.24" "Laser Display CON.27" "Laser Display CON.30" "USB-TYPE C.1" "USB-TYPE C.2" "USB-TYPE C.3" "USB-TYPE C.4" "USB-TYPE C.A1" "USB-TYPE C.A12" "USB-TYPE C.B1" "USB-TYPE C.B12" C7.2 C8.2 C9.2 C10.2 C11.2 C12.2 C13.2 C14.2 C15.2 C16.2 C17.2 C18.2 C19.2 C20.2 C21.2 C22.2 C23.2 C24.2 C25.2 C26.2 C27.2 C28.2 C29.2 C30.2 C31.2 C32.2 C33.2 C34.2 C35.2 C36.2 C37.2 C38.2 C39.1 C40.2 C41.2 C42.2 C43.2 C44.2 C45.2 C46.2 C47.2 C48.2 C49.2 C50.1 C51.2 C52.2 C53.2 C54.2 C55.2 C56.2 C58.2 D2.A LED1.2 LED2.2 LT7911D_I2C.3 pad.2 R11.1 R22.1 R23.1 RESET.2 STM32_I2C.4 U1.65 U2.1 U3.8 U3.23 U3.35 U3.47 U4.2 Y2.3 | length 27.4
  Top w0.254: U3.8@4.01,-7.78 7.341,-7.78 7.51,-7.78 v3(8.26,-7.03) ; 4.77,-20.57 4.77,-19.82 ; U3.47@6.01,-2.78 6.01,-4.78 6.416,-5.186 7.297,-6.067 v3(8.26,-7.03) ; 6.27,-20.57 6.27,-19.82 ; 7.77,-20.648 7.77,-19.82 ; 9.27,-20.682 9.27,-19.82 ; U3.23@10.51,-11.28 10.51,-9.28 10.273,-9.043 9.3,-8.07 v3(8.26,-7.03) ; 10.77,-20.841 10.77,-19.82 ; U3.35@12.51,-4.78 10.51,-4.78 10.074,-5.216 9.235,-6.055 v3(8.26,-7.03)
  Top w0.305: R11.1@28.878,-20.882 29.061,-20.882 29.061,-21.848 v1(29.113,-21.848) ; v1@39.69,-10.115 39.705,-10.115 40.666,-10.115 ; v1@39.777,-15.615 40.666,-15.615
  Bottom w0.305: C7.2@30.512,-8.603 C7.2@30.517,-8.603 ; C26.2@34.248,-18.698 C26.2@34.248,-18.692
  other v1: 4.775,-21.74 6.224,-21.734 15.292,-21.742 7.699,-21.702 42.656,-20.946 31.666,-18.076 26.55,-17.634 34.491,-16.43 39.777,-15.625 33.32,-15.306 25.104,-14.89 26.12,-14.89 27.136,-14.89 28.152,-14.89 29.168,-14.89 25.104,-13.874 26.12,-13.874 27.136,-13.874 28.152,-13.874 29.168,-13.874 4.758,-13.185 37.055,-12.956 25.104,-12.858 26.12,-12.858 27.136,-12.858 28.152,-12.858 29.168,-12.858 25.104,-11.842 26.12,-11.842 27.136,-11.842 28.152,-11.842 29.168,-11.842 25.104,-10.826 26.12,-10.826 27.136,-10.826 28.152,-10.826 29.168,-10.826 -1.082,-10.12 39.705,-10.106 21.54,-9.56 33.009,-7.744 -1.386,-7.479 0.676,-7.479 41.91,-6.794 2.177,-5.487 25.707,-5.215 46.239,-4.418 31.467,-3.943 35.626,-3.747 21.718,-3.583 3.032,-2.075 12.272,-2.039 19.577,-1.746 20.685,1.412
  other v2: 8.421,-9.082 10.25,-9.065 6.36,-9.049 7.341,-8.084 9.286,-8.084 6.327,-7.22 10.25,-7.187 9.319,-6.139 7.241,-6.123 8.338,-5.275 10.117,-5.258 6.36,-5.242
GPIO5: U1.26 U3.26 | length 17.4
  Top w0.2: U3.26@12.51,-9.28 13.209,-9.28 v1@13.651,-9.721 ; v1(25.82,-6.55) 25.86,-6.55 26.746,-7.436 U1.26@26.746,-8.699
  GND w0.305: v1(13.665,-9.789) 19.549,-9.789 22.788,-6.55 v1(25.82,-6.55)
HD_READY: "Laser Display CON.12" U3.18 | length 13.5
  Top w0.254: v1@8.01,-12.53 U3.18@8.01,-11.28 ; 12.27,-19.82 12.27,-20.854 v1(12.273,-20.857)
  Bottom w0.254: v1(7.93,-12.53) 7.93,-12.923 8.099,-13.092 10.128,-13.092 10.813,-13.777 10.813,-16.947 12.267,-18.401 v1@12.267,-20.778